# Altium PCB PCB2.PcbDoc
Units mm, origin at the board's own origin, x right, y up, seen from the top; angles counter-clockwise.
Board outline 140 x 84 mm, 2 copper layers (Top Layer, Bottom Layer); 46 components, 14 nets, 146 pads, 30 vias.
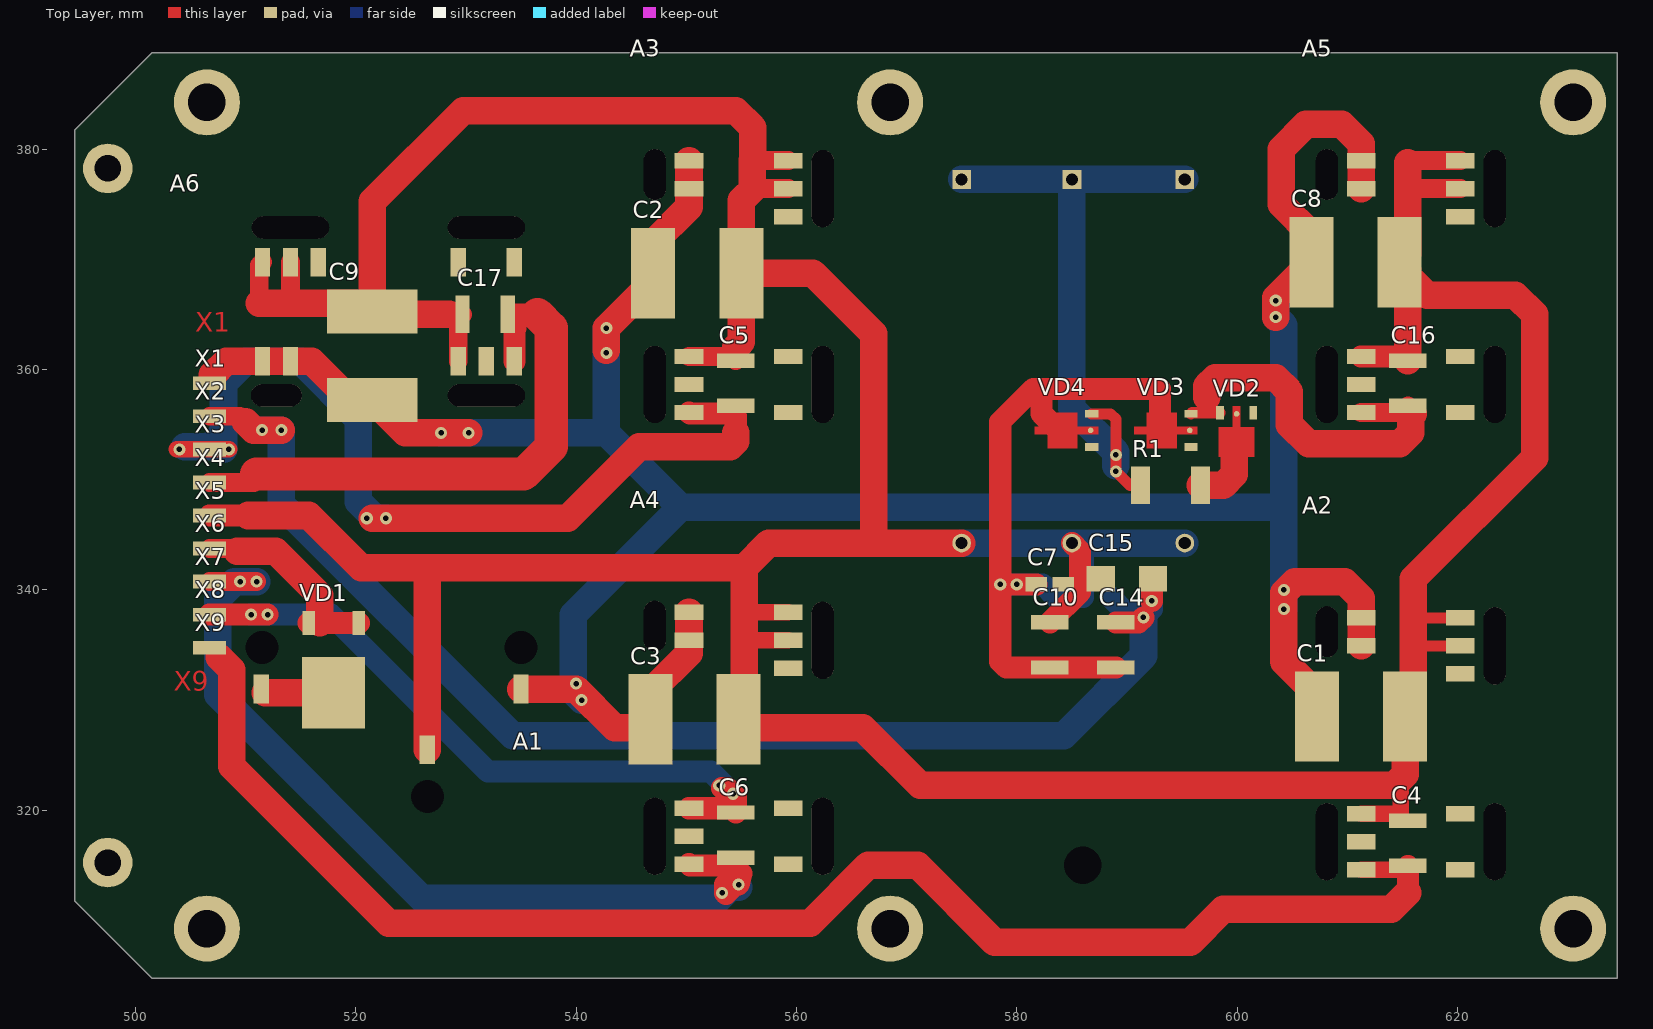
[diagram p0: Top Layer view]
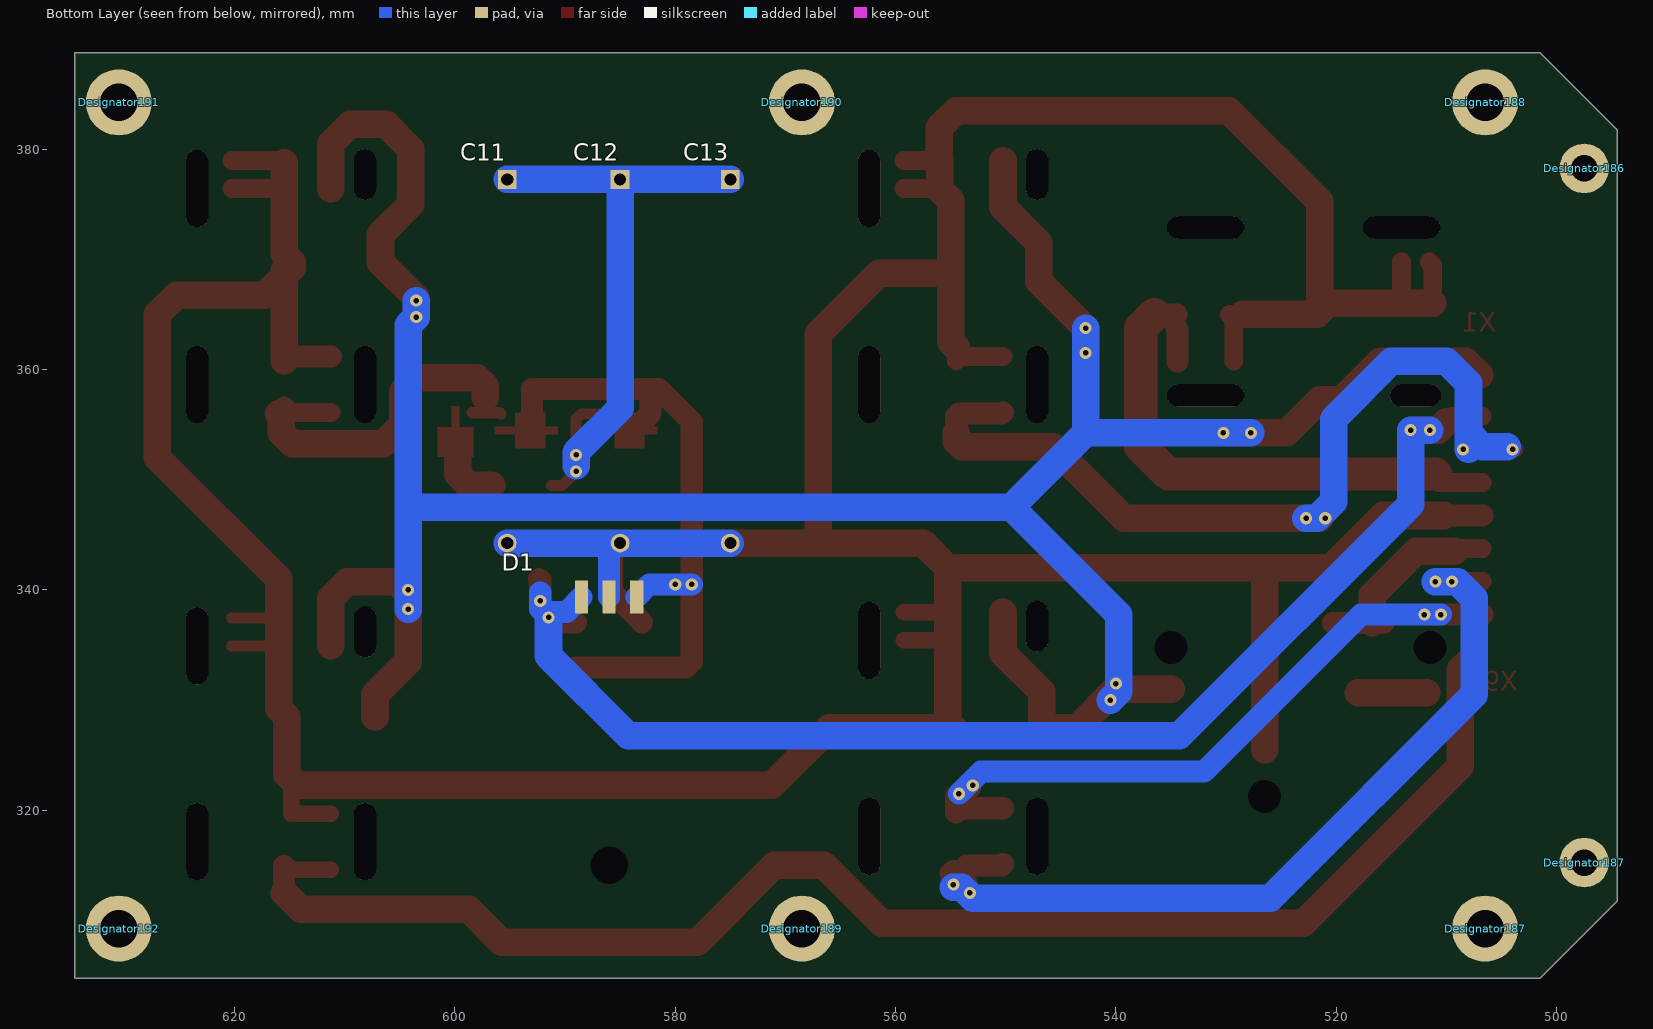
[diagram p1: Bottom Layer view, seen from below]
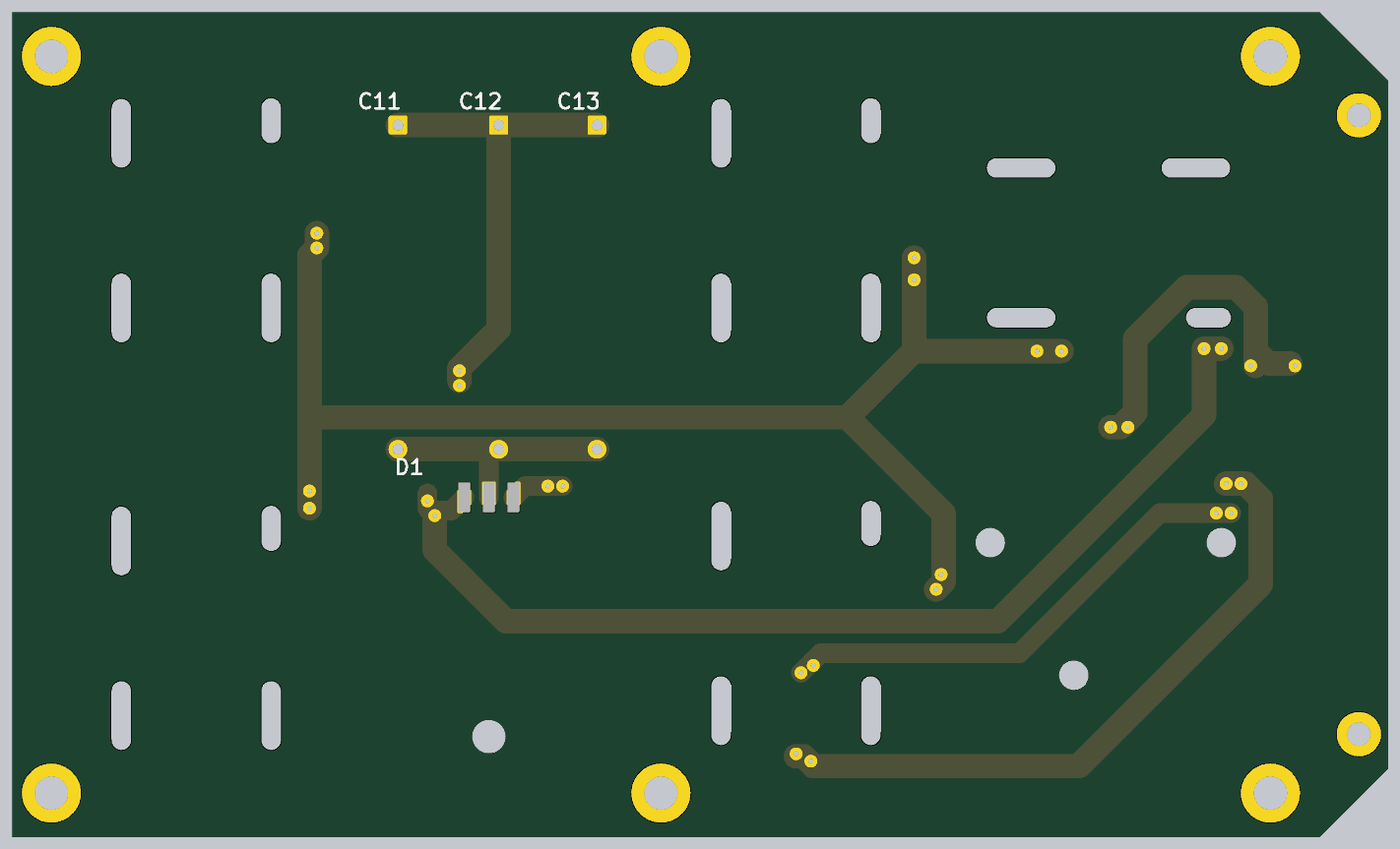
[diagram p2: 3D render of the assembled board from below, using the file's embedded part models]

## Layer stack, top to bottom
Top Solder: solder mask 0.0102, Solder Resist, Dk 3.5
Top Layer: signal copper 0.0356
Dielectric 1: dielectric 0.32, FR-4, Dk 4.8
Bottom Layer: signal copper 0.0356
Bottom Solder: solder mask 0.0102, Solder Resist, Dk 3.5

## Board outline
494.5,311.75 501.5,304.75 634.5,304.75 634.5,388.75 501.5,388.75 494.5,381.75

## Design rules (kind name [scope] priority, off if disabled: settings)
Clearance [All] p1: gap=0.2
PolygonConnect [All] p1: connectstyle=Relief reliefconductorwidth=0.254 reliefentries=4 polygonreliefangle="90 Angle" airgapwidth=0.254
RoutingVias [All] p1: holewidth=0.5 width=1.1 viastyle="Through Hole" minholewidth=0.5 minwidth=1.1 maxholewidth=0.711 maxwidth=1.27
SolderMaskExpansion [All] p1: expansion=0.102
UnpouredPolygon [All] p1: allowunpoured=FALSE
Width [All] p1: maxlimit=4 minlimit=0.2 preferedwidth=0.5
29 further rules are at their usual default settings.

## Classes and differential pairs
component class ПКГН.436634.004Э3: A1 A2 A3 A4 A5 A6 C1 C2 C3 C4 C5 C6 C7 C8 C9 C10 C11 C12 C13 C14 C15 C16 C17 D1 R1 VD1 VD2 VD3 VD4 X1 X2 X3 X4 X5 X6 X7 X8 X9

## Components (designator, comment, footprint, x,y, rotation, side; value= is the part's Value field where it differs from the comment)
A1 "МРО1-В2,5ДМУ" "МРО1-У - БЕЗ ОТВ" 511.5,334.75 r270 bottom locked
A2 "МДМ3-1Е3.3ВУП" МДМ3-Е-У 615.75,326 r270 top
A3 "МДМ3-1Е05ВУП" МДМ3-Е-У 554.75,367.5 r270 top
A4 "МДМ3-1Е05ВУП" МДМ3-Е-У 554.75,326.5 r270 top
A5 "Модуль питания МДМ5-1Е05ВУП БКЮС.430609.002-01ТУ" МДМ3-Е-У 615.75,367.5 r270 top
A6 "МДМ8-1Е05ВУП" МДМ3-Е-У 523,365.25 r0 top
C1 "1,5 мкФ" K10-67_10x8x3.5 611.25,328.5 r0 top
C2 "1,5 мкФ" K10-67_10x8x3.5 551,368.75 r0 top
C3 "1,5 мкФ" K10-67_10x8x3.5 550.75,328.25 r0 top
C4 "К10-69в-Н90-25В-1,5 мкФ ±20% (4532М) луженые" K10-69B_4.5_3.2(1812) 615.5,317 r90 top
C5 "1,5 мкФ" K10-69B_4.5_3.2(1812) 554.5,358.75 r90 top
C6 "1,5 мкФ" K10-69B_4.5_3.2(1812) 554.5,317.75 r90 top
C7 "4,7 мкФ" TANTAL-A(3216) 583,340.5 r0 top
C8 "1,5 мкФ" K10-67_10x8x3.5 610.75,369.75 r0 top
C9 "1,5 мкФ" K10-67_10x8x3.5 521.5,361.25 r90 top
C10 "1,5 мкФ" K10-69B_4.5_3.2(1812) 583,335 r270 top
C11 "3300 мкФ" k52-18-16B-2200 595.25,377.25 r270 bottom
C12 "3300 мкФ" k52-18-16B-2200 585.002,377.249 r270 bottom
C13 "3300 мкФ" k52-18-16B-2200 575,377.25 r270 bottom
C14 "1 мкФ" K10-69B_4.5_3.2(1812) 589,335 r270 top
C15 "47 мкФ" TANTAL-C(6032) 590,341 r180 top
C16 "1,5 мкФ" K10-69B_4.5_3.2(1812) 615.5,358.75 r90 top
C17 "1,5 мкФ" K10-69B_4.5_3.2(1812) 531.75,365 r180 top
D1 "1303ЕН3,3П" TO-220 586,339.25 r0 bottom
Designator186 "Comment" OTV-2.4MM 497.5,378.25 r90 bottom locked
Designator187 "Comment" OTV-2.4MM 497.5,315.25 r90 bottom locked
Designator187 "Comment" OTV-3.4ММ 506.5,309.25 r90 bottom locked
Designator188 "Comment" OTV-3.4ММ 506.5,384.25 r90 bottom locked
Designator189 "Comment" OTV-3.4ММ 568.5,309.25 r90 bottom locked
Designator190 "Comment" OTV-3.4ММ 568.5,384.25 r90 bottom locked
Designator191 "Comment" OTV-3.4ММ 630.5,384.25 r90 bottom locked
Designator192 "Comment" OTV-3.4ММ 630.5,309.25 r90 bottom locked
R1 "110 Ом" P1-12-1(2512) 593.95,349.475 r0 top
VD1 "2Д290ГС9" KT-89 518,337 r180 top
VD2 "2ДШ2123А95" KT-99-1 599.95,355.975 r180 top
VD3 "2ДШ2123А95" KT-99-1 595.7,354.475 r90 top
VD4 "2ДШ2123А95" KT-99-1 586.7,354.475 r90 top
X1 "CONT" Пл.площ.3х1.25 506.75,358.75 r0 top
X2 "CONT" Пл.площ.3х1.25 506.75,355.75 r0 top
X3 "CONT" Пл.площ.3х1.25 506.75,352.75 r0 top
X4 "CONT" Пл.площ.3х1.25 506.75,349.75 r0 top
X5 "CONT" Пл.площ.3х1.25 506.75,346.75 r0 top
X6 "CONT" Пл.площ.3х1.25 506.75,343.75 r0 top
X7 "CONT" Пл.площ.3х1.25 506.75,340.75 r0 top
X8 "CONT" Пл.площ.3х1.25 506.75,337.75 r0 top
X9 "CONT" Пл.площ.3х1.25 506.75,334.75 r0 top

## Footprints (in the part's own frame and the unit in brackets; to place one, negate y for a bottom-side part, rotate by r counter-clockwise, add the part's x,y. Pads: shape width x height; smd on the part's side, far side on the other; paste and mask are expansions set on the pad)
K10-67_10x8x3.5 [mm] "Chip Capacitor, 2-Leads, Body 10,00x8,00mm, IPC Medium Density"
  rect 4x8.2 smd: 1(-4,0) 2(4,0)
  body extent -5,-4 5,4, height 3.5
K10-69B_4.5_3.2(1812) [mm]
  rect 1.3x3.4 smd: 1(-2.05,0) 2(2.05,0)
  body extent -2.25,-1.6 2.25,1.6, height 1.8
k52-18-16B-2200 [mm]
  rect 1.7x1.7 hole 1.1: 1(0,0)
  round 1.7 hole 1.1: 2(33,0)
  body extent -0.4,-4.5 33.4,4.5, height 8.5
KT-89 [mm]
  rect 1.14x2.16 smd: 1(-2.28,0) 3(2.28,0)
  round 0.5 smd: 2(0,3.75)
  rect 5.72x6.48 smd: 4(0,6.35)
  body extent -3.27,-0.55 3.28,9.35, height 2.4
KT-99-1 [mm]
  rect 0.7x1.2 smd: 1(-1.5,-0.1) 2(1.5,-0.1)
  round 0.5 smd paste-25.4 mask-25.4: 3(0,0)
  Top Layer region: -0.35,-0.7 0.35,-0.7 0.35,1.2 1.6,1.2 1.6,3.9 0.35,3.9 0.35,5.05 -0.35,5.05 -0.35,3.9 -1.6,3.9 -1.6,1.2 -0.35,1.2
  body extent -2.3,-0.45 2.3,4.8, height 1.8
OTV-2.4MM [mm]
  round 4.5 hole 2.4: 1(0,0)
OTV-3.4ММ [mm]
  round 6 hole 3.4: 1(0,0)
P1-12-1(2512) [mm]
  rect 1.75x3.4 smd: 1(-2.725,0) 2(2.725,0)
  body extent -3.15,-1.6 3.15,1.6, height 0.8
TANTAL-A(3216) [mm] "Molded Capacitor, 2-Leads, Body 3,20x1,60mm, IPC Medium Density"
  rect 1.95x1.3 smd: 1(-1.225,0) 2(1.225,0)
  body extent -1.6,-0.8 1.6,0.8, height 1.8
TANTAL-C(6032) [mm] "Molded Capacitor, 2-Leads, Body 6,00x3,20mm, IPC Medium Density"
  rect 2.55x2.3 smd: 1(-2.375,0) 2(2.375,0)
  body extent -3,-1.6 3,1.6, height 2.8
TO-220 [mm]
  round 2.2 hole 3.4 unplated: 0(0,24.25)
  rect 1.2x3 smd: 1(-2.5,-0.1) 2(0,-0.1) 3(2.5,-0.1)
  body extent -10,-0.55 10,32.05, height 13
МДМ3-Е-У [mm]
  oval 4.6x2 hole 2 slot 4.6 at 0 deg unplated: 0(-10.2,-7.6)
  oval 7x2 hole 2 slot 7 at 0 deg unplated: 0(-8.92,7.64) 0(8.86,7.64) 0(8.86,-7.6)
  rect 1.4x2.6 smd: 2(-11.46,4.5) 3(-8.92,4.5) 4(-6.38,4.5) 9(6.32,4.5) 11(11.4,4.5) 14(11.4,-4.5) 15(8.86,-4.5) 16(6.32,-4.5) 22(-8.92,-4.5) 23(-11.46,-4.5)
  body extent -20,-10 20,10, height 4
"МРО1-У - БЕЗ ОТВ" [mm]
  rect 2.6x1.4 smd far side: 1(3.75,0.07) 2(3.75,-23.5) 3(9.25,-15)
  round 1.7 hole 3 unplated: 4(0,0) 5(13.5,-15) 6(0,-23.5)
  body extent -3.5,-31.5 16.5,8.5, height 11
Пл.площ.3х1.25 [mm]
  rect 3x1.25 smd: 1(0,0)

## Part data
A1: library part МРО, "Модуль защиты и фильтрации"
A2 A3 A4 A5 A6: library part МДМ3-1Е3.3ВП
C1 C2 C3 C4 C5 C6 C8 C9 C10 C14 C16 C17: library part К10-69, "Керамический чип-конденсатор серии К10-79"
C7 C11 C12 C13 C15: library part К53-67, "Оксидно-полупроводниковый танталовый чип-конденсатор серии К53-68"
R1: library part Р1-12, "Постоянные непроволочные безвыводные резисторы общего применения Р1-12"
VD1: "Диод 2Д290ГС9"
VD2 VD3 VD4: "Диод Шоттки"
X1 X2 X3 X4 X5 X6 X7 X8 X9: "CONT1_SMD"

## Via types
v1: diameter 1.1, hole 0.5, Top Layer to Bottom Layer, 30 vias

## Nets (pads, with @x,y where several pads share a name; then routed paths per layer and width w, separated by ;. In a path a pad name is that pad's centre, name@x,y a point inside that pad or via, vN(x,y) a via of type N, cw(c..) or ccw(c..) an arc to the next point about the centre after c; other vN are vias at no path point)
+3.3V: C14.1 C15.1 D1.3 X2.1 | length 119.1
  Top Layer w1.7: X2.1 509.5,355.75 510,355.25
  Top Layer w2: C14.1 591.05,337.05 v1(591.5,337.5) ; v1(592.25,339) 592.25,340.875 C15.1
  Top Layer w2.5: 510,355.25 510.75,354.5 v1(513.25,354.5)
  Bottom Layer w2: D1.3 589.85,338 v1@591.5,338 ; 592,338 592.25,338.25 v1(592.25,339) 592.25,339.75
  Bottom Layer w2.5: v1(511.5,354.5) v1(513.25,354.5) 513.25,347.75 534.25,326.75 584.25,326.75 591.5,334 v1(591.5,337.5)
+3.3VEXT: A2.14 C4.1 X9.1 | length 136.8
  Top Layer w1.5: A2.14 615.15,314.6 C4.1
  Top Layer w2: 615.5,312.5 C4.1
  Top Layer w2.5: 507.625,333.875 508.75,332.75 508.75,324 523,309.75 561.25,309.75 566.5,315 571,315 578,308 595.75,308 598.75,311 614,311 615.5,312.5
+5V: A3.14 C5.1 X3.1 | length 83.2
  Top Layer w1.5: v1@503.75,352.75 v1(504,352.75) v1(508.5,352.75)
  Top Layer w2: A3.14 550.35,356 554.25,356 554.5,355.75 554.5,354.25
  Top Layer w2.5: v1@521.5,346.5 539.25,346.5 545.75,353 554,353 554.5,353.5 554.5,354.25
  Bottom Layer w2.5: 504.5,353 506.75,353 508,354.25 ; v1@508,352.75 508,354.25 ; v1(522.75,346.5) 521.75,346.5 520.25,348 520.25,355.5 515,360.75 510,360.75 508,358.75 508,354.25
  other v1: 521,346.5
+5VETH: A6.14 C17.1 X4.1 | length 50.2
  Top Layer w1.7: X4.1 510.75,349.75 511,350 511,350.5
  Top Layer w2: A6.14 534.4,363.65 534.5,363.75 ; 534.5,365 536.5,365
  Top Layer w3: 511,350.5 535.25,350.5 537.75,353 537.75,363.75 536.5,365
+5VGD: A4.14 C6.1 X7.1 | length 79.8
  Top Layer w1.7: X7.1 v1(511,340.75)
  Top Layer w2: A4.14 550.35,315 553.5,315 ; 553.5,313.25 553.5,312.5 553.594,312.406 554.437,313.25 v1(554.75,313.25) 555,314.25 554.75,314.5
  Bottom Layer w2: v1@554.75,313 v1(554.75,313.25)
  Bottom Layer w2.5: v1(511,340.75) 509,340.75 507.5,339.25 507.5,330.5 526,312 553,312 554,313 v1@554.75,313
  other v1: 553.25,312.5 509.5,340.75
+5VIN: A5.14 C16.1 VD2.2 VD3.2 | length 35
  Top Layer w1: VD3.2 595.9,356.075 597.175,356.075 ; 597.25,357.5 597.175,357.425 597.175,356.075 ; VD2.2 597.175,356.075
  Top Layer w1.7: A5.14 614.9,356.1 C16.1
  Top Layer w2.5: 597.25,357.5 597.25,358.5 598,359.25 603.5,359.25 604.75,358 604.75,355 606.5,353.25 614.75,353.25 615.75,354.25 615.75,355.75 616,356
+5VOUT: C7.1 C10.2 C14.2 D1.1 VD3.3 VD4.3 | length 64.7
  Top Layer w2: C7.1 v1(578.5,340.5) ; 583.75,354.5 582.25,356 582.25,357.5 581.5,358.25 ; C14.2 C10.2 579.05,332.95 578.5,333.5 v1(578.5,340.5) ; 593,355.25 593,358.25 581.5,358.25 ; v1(578.5,340.5) 578.5,355.25 581.5,358.25
  Bottom Layer w2: v1(578.5,340.5) 582.35,340.5 D1.1
  other v1: 580,340.5
+27INV: VD1.1 VD1.3 X6.1 | length 19.9
  Top Layer w1.7: X6.1 509,343.75 509.25,343.5
  Top Layer w2: 516.75,337 VD1.3 VD1.1
  Top Layer w2.5: 509.25,343.5 512.75,343.5 516.75,339.5 516.75,337
+27V: A1.2 A2.22 A2.23 A3.22 A3.23 A4.22 A4.23 A5.22 A5.23 A6.22 A6.23 C1.1 C2.1 C3.1 C8.1 C9.1 X1.1 | length 266.2
  Top Layer w2.5: 507,359.5 508.25,360.75 516,360.75 519.5,357.25 C9.1 524.5,354.25 v1(530.25,354.25) ; A1.2 540,331 543.5,327.5 546.75,327.5 546.75,330.75 550.25,334.25 A4.22 A4.23 ; v1@542.75,361.75 v1(542.75,363.75) 547,368 C2.1 547,371.5 550.25,374.75 A3.22 A3.23 ; v1(603.5,364.75) 603.5,366.5 C8.1 606.75,372.25 604,375 604,380 606.25,382.25 609.5,382.25 611.25,380.5 A5.23 A5.22 ; C1.1 607.25,330.5 604.25,333.5 v1(604.25,338.25) 604.25,339.75 605.25,340.75 609.75,340.75 611.25,339.25 A2.23 A2.22
  Bottom Layer w2.5: v1(527.75,354.25) v1(530.25,354.25) 542.75,354.25 ; v1(540.5,330) 539.75,330.75 539.75,337.75 549.5,347.5 ; v1(542.75,363.75) v1(542.75,361.5) 542.75,354.25 ; v1(603.5,366.25) v1(603.5,364.75) 604.25,364 604.25,347.75 ; v1(604.25,338.25) v1(604.25,340) 604.25,347.5 549.5,347.5 ; 542.75,354.25 549.5,347.5
  other v1: 540,331.5
GND: A1.3 A2.2 A2.3 A2.16 A3.2 A3.3 A3.16 A4.2 A4.3 A5.2 A5.3 A5.16 A6.2 A6.3 A6.16 C1.2 C2.2 C3.2 C4.2 C5.2 C7.2 C8.2 C9.2 C10.1 C11.2 C12.2 C13.2 C15.2 C16.2 C17.2 D1.2 X5.1 | length 460.1
  Top Layer w1: 616,334.75 616.17,334.92 A2.3 ; 616,337.25 616.21,337.46 A2.2
  Top Layer w1.5: 555.25,335.25 555.42,335.42 A4.3 ; 555.25,337.75 555.46,337.96 A4.2 ; A2.16 614.87,319.68 614.87,321.63 614.25,322.25
  Top Layer w1.7: 511.25,366 511.25,369.46 A6.2 ; A6.3 514.08,366.17 514.25,366 ; 528.5,365 C17.2 529.32,364.62 A6.16 ; A3.16 554.12,361.18 C5.2 ; 556,379 556.04,378.96 A3.2 ; 556.08,376.42 A3.3 ; 615.5,376.5 615.58,376.42 A5.3 ; 615.5,378.75 615.71,378.96 A5.2
  Top Layer w2: X5.1 510.25,346.75 ; C10.1 585.75,339.8 585.75,343.501 C12.2 ; A5.16 615.12,361.18 C16.2
  Top Layer w2.5: 510.25,346.75 515.75,346.75 520.5,342 555.25,342 ; 511.25,366 514.25,366 520.75,366 C9.2 ; A1.3 526.5,341.25 ; 528.5,365 521.75,365 C9.2 ; 554.5,362 555,362.5 C2.2 ; 556,379 556,376.5 556.08,376.42 555,375.34 C2.2 ; 556.04,378.96 556.04,381.96 554.5,383.5 529.75,383.5 521.5,375.25 C9.2 ; C13.2 567,344.25 ; C16.2 C8.2@615.5,368.5 ; 615.5,378.75 615.5,376.5 615.5,370.5 C8.2 ; C2.2 561.5,368.75 567,363.25 567,344.25 ; 555.25,342 555.25,337.75 555.25,335.25 555.25,328 554.75,327.5 566,327.5 571.25,322.25 614.25,322.25 615.25,323.25 C1.2 616,329.25 616,334.75 616,337.25 616,341 627,352 627,365 625.25,366.75 617.25,366.75 C8.2@615.5,368.5 ; 555.25,342 557.5,344.25 567,344.25 ; C8.2 614.75,369.25 C8.2@615.5,368.5 ; C8.2 615.5,369 C8.2@615.5,368.5
  Bottom Layer w2: C12.2 585.5,344.25 586,343.75 D1.2
  Bottom Layer w2.5: C13.2 C12.2 ; C12.2@585.5,344.25 C11.2
GNDGD: A4.16 C6.2 X8.1 | length 63.1
  Top Layer w2: X8.1 v1(512,337.75) ; A4.16 554.12,320.18 C6.2 554.5,321.25 553.75,322 v1@553.25,322
  Bottom Layer w2: v1(510.5,337.75) 517.75,337.75 532,323.5 552.25,323.5 v1(554.25,321.5)
  other v1: 553,322.25
NetA1_1: A1.1 VD1.2 VD1.4 | length 6.7
  Top Layer w1.5: A1.1 A1.1@511.78,330.65
  Top Layer w2.5: A1.1@511.78,330.65 VD1.4
NetC11_1: C11.1 C12.1 C13.1 R1.1 VD4.2 | length 57.8
  Top Layer w1: VD4.2 588.525,355.975 589,355.5 v1(589,350.75) 590.275,349.475 R1.1
  Bottom Layer w2.5: C13.1 C12.1@585.001,377.25 ; v1@589,351.25 589,352.5 585.002,356.498 C12.1 ; C11.1@595.249,377.249 C12.1
  other v1: 589,352.25
NetR1_2: R1.2 VD2.3 | length 6
  Top Layer w2.5: R1.2 598.725,349.475 599.75,350.5 599.75,353
pads on no net: A1.4 A1.5 A1.6 A2.0 A2.4 A2.9 A2.11 A2.15 A3.0 A3.4 A3.9 A3.11 A3.15 A4.0 A4.4 A4.9 A4.11 A4.15 A5.0 A5.4 A5.9 A5.11 A5.15 A6.0 A6.4 A6.9 A6.11 A6.15 D1.0 Designator186.1 Designator187.1 Designator188.1 Designator189.1 Designator190.1 Designator191.1 Designator192.1 VD2.1 VD3.1 VD4.1

## Other copper
Top Layer:
  text "X1" at 505.425,362.85 h3
  text "X9" at 503.5,330.25 h3

## Silkscreen, mask and mechanical layers (free items; w line width, h text height)
Mechanical 30:
  circle w0.005: c511.54,372.87 r0.85
  circle w0.005: c514.08,372.87 r0.85
  circle w0.005: c516.62,372.87 r0.85
  circle w0.005: c529.32,372.87 r0.85
  circle w0.005: c534.4,372.87 r0.85
  circle w0.005: c511.54,357.63 r0.85
  circle w0.005: c529.32,357.63 r0.85
  circle w0.005: c531.86,357.63 r0.85
  circle w0.005: c534.4,357.63 r0.85
  circle w0.005: c562.37,378.96 r0.85
  circle w0.005: c562.37,376.42 r0.85
  circle w0.005: c562.37,373.88 r0.85
  circle w0.005: c547.13,378.96 r0.85
  circle w0.005: c547.13,376.42 r0.85
  circle w0.005: c547.13,361.18 r0.85
  circle w0.005: c547.13,358.64 r0.85
  circle w0.005: c547.13,356.1 r0.85
  circle w0.005: c623.37,378.96 r0.85
  circle w0.005: c623.37,376.42 r0.85
  circle w0.005: c623.37,373.88 r0.85
  circle w0.005: c623.37,361.18 r0.85
  circle w0.005: c623.37,356.1 r0.85
  circle w0.005: c608.13,378.96 r0.85
  circle w0.005: c608.13,361.18 r0.85
  circle w0.005: c608.13,358.64 r0.85
  circle w0.005: c608.13,356.1 r0.85
  circle w0.005: c608.13,376.42 r0.85
  circle w0.005: c623.37,314.6 r0.85
  circle w0.005: c497.5,315.25 r1.2
  circle w0.005: c497.5,378.25 r1.2
  circle w0.005: c630.5,309.25 r3.5
  circle w0.005: c568.5,309.25 r3.5
  circle w0.005: c568.5,384.25 r3.5
  circle w0.005: c506.5,384.25 r3.5
  circle w0.005: c506.5,309.25 r3.5
  circle w0.005: c630.5,384.25 r3.5
  circle w0.005: c535,334.75 r0.85
  circle w0.005: c511.5,334.75 r0.85
  circle w0.005: c526.5,321.25 r0.85
  circle w0.005: c562.37,337.96 r0.85
  circle w0.005: c562.37,335.42 r0.85
  circle w0.005: c562.37,332.88 r0.85
  circle w0.005: c562.37,320.18 r0.85
  circle w0.005: c562.37,315.1 r0.85
  circle w0.005: c547.13,337.96 r0.85
  circle w0.005: c547.13,335.42 r0.85
  circle w0.005: c547.13,320.18 r0.85
  circle w0.005: c547.13,317.64 r0.85
  circle w0.005: c547.13,315.1 r0.85
  circle w0.005: c608.13,314.6 r0.85
  circle w0.005: c608.13,317.14 r0.85
  circle w0.005: c608.13,319.68 r0.85
  circle w0.005: c608.13,334.92 r0.85
  circle w0.005: c608.13,337.46 r0.85
  circle w0.005: c623.37,337.46 r0.85
  circle w0.005: c623.37,334.92 r0.85
  circle w0.005: c623.37,332.38 r0.85
  circle w0.005: c623.37,319.68 r0.85
  circle w0.005: c562.37,356.1 r0.85
  circle w0.005: c562.37,361.18 r0.85
  circle w0.005: c514.08,357.63 r0.85
  lines w0.005: 494.5,311.75 501.5,304.75 634.5,304.75 634.5,388.75 501.5,388.75 494.5,381.75 494.5,311.75